# EAGLE board candle3x (EAGLE 6.6.0)
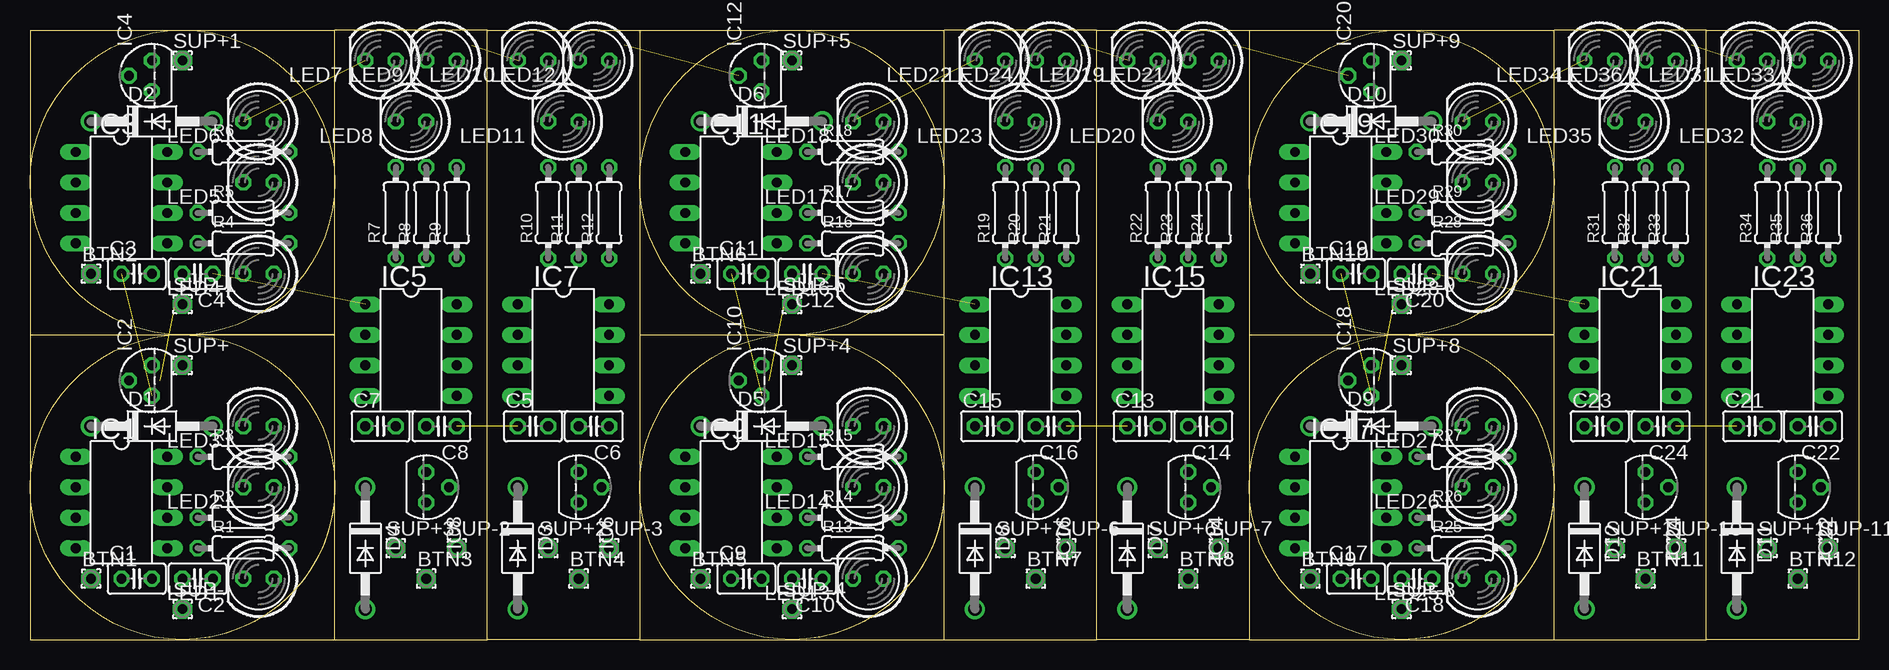
[diagram p0: board, top side]
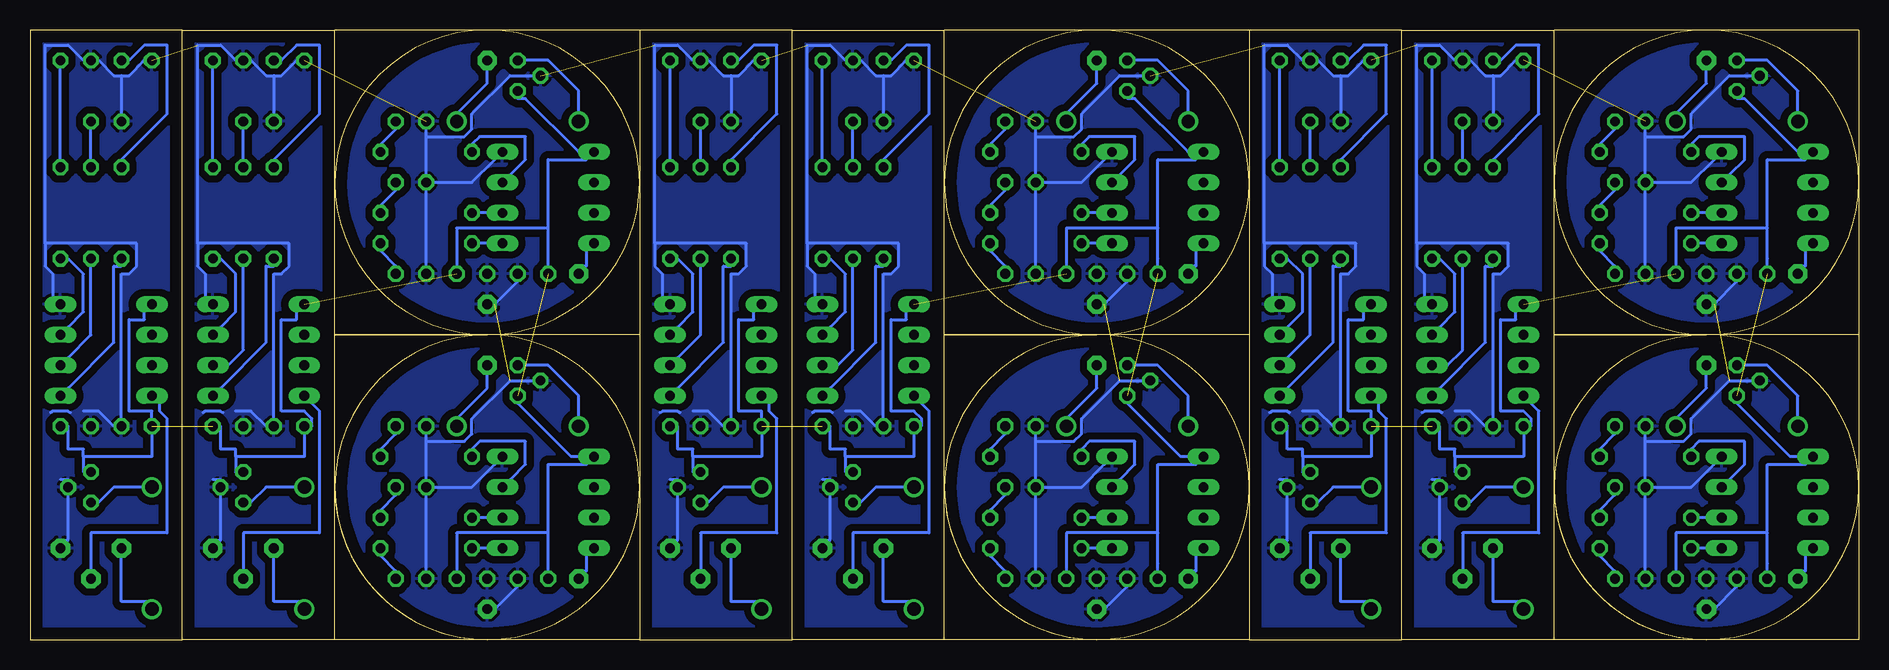
[diagram p1: board, bottom side, seen from below]

Size 152.4 x 50.8 mm. Coordinates in mm from the lower left corner, seen from the top.
Outline: 25.4,0 25.4,25.4
Outline: 25.4,25.4 12.7,25.4
Outline: 25.4,12.7 arc-90 12.7,0
Outline: 12.7,0 arc-90 0,12.7
Outline: 0,25.4 0,12.7
Outline: 0,12.7 0,0 12.7,0
Outline: 0,25.4 12.7,25.4
Outline: 12.7,25.4 25.4,25.4
Outline: 12.7,0 25.4,0
Outline: 0,12.7 arc-90 12.7,25.4
Outline: 12.7,25.4 arc-180 12.7,0
Outline: 0,38.1 0,25.4
Outline: 0,38.1 0,50.8 25.4,50.8
Outline: 25.4,25.4 25.4,38.1
Outline: 25.4,38.1 25.4,50.8
Outline: 0,38.1 arc-180 25.4,38.1
Outline: 25.4,38.1 arc-90 12.7,25.4
Outline: 12.7,25.4 arc-90 0,38.1
Outline: 25.4,0 38.1,0
Outline: 38.1,0 38.1,50.8
Outline: 38.1,50.8 25.4,50.8
Outline: 38.1,50.8 50.8,50.8
Outline: 50.8,50.8 50.8,0
Outline: 50.8,0 38.1,0
Outline: 76.2,0 76.2,25.4
Outline: 76.2,25.4 63.5,25.4
Outline: 76.2,12.7 arc-90 63.5,0
Outline: 63.5,0 arc-90 50.8,12.7
Outline: 50.8,25.4 50.8,12.7
Outline: 50.8,12.7 50.8,0
Outline: 50.8,25.4 63.5,25.4
Outline: 63.5,25.4 76.2,25.4
Outline: 50.8,0 63.5,0
Outline: 63.5,0 76.2,0
Outline: 50.8,12.7 arc-90 63.5,25.4
Outline: 63.5,25.4 arc-180 63.5,0
Outline: 50.8,38.1 50.8,25.4
Outline: 50.8,50.8 50.8,38.1
Outline: 50.8,50.8 76.2,50.8
Outline: 76.2,25.4 76.2,38.1
Outline: 76.2,38.1 76.2,50.8
Outline: 50.8,38.1 arc-180 76.2,38.1
Outline: 76.2,38.1 arc-90 63.5,25.4
Outline: 63.5,25.4 arc-90 50.8,38.1
Outline: 76.2,0 88.9,0
Outline: 88.9,0 88.9,50.8
Outline: 88.9,50.8 76.2,50.8
Outline: 88.9,50.8 101.6,50.8
Outline: 101.6,50.8 101.6,0
Outline: 101.6,0 88.9,0
Outline: 127,0 127,25.4
Outline: 127,25.4 114.3,25.4
Outline: 127,12.7 arc-90 114.3,0
Outline: 114.3,0 arc-90 101.6,12.7
Outline: 101.6,25.4 101.6,12.7
Outline: 101.6,12.7 101.6,0
Outline: 101.6,25.4 114.3,25.4
Outline: 114.3,25.4 127,25.4
Outline: 101.6,0 114.3,0
Outline: 114.3,0 127,0
Outline: 101.6,12.7 arc-90 114.3,25.4
Outline: 114.3,25.4 arc-180 114.3,0
Outline: 101.6,38.1 101.6,25.4
Outline: 101.6,50.8 101.6,38.1
Outline: 101.6,50.8 127,50.8
Outline: 127,25.4 127,38.1
Outline: 127,38.1 127,50.8
Outline: 101.6,38.1 arc-180 127,38.1
Outline: 127,38.1 arc-90 114.3,25.4
Outline: 114.3,25.4 arc-90 101.6,38.1
Outline: 127,0 139.7,0
Outline: 139.7,0 139.7,50.8
Outline: 139.7,50.8 127,50.8
Outline: 139.7,50.8 152.4,50.8 152.4,0 139.7,0
Copper layers (1*16): Top 0.035mm / dielectric 1.5mm / Bottom 0.035mm
Design rules "10mils": minimum track width 10mil, minimum drill 24mil, track to track 10mil, track to pad 10mil, pad to pad 10mil, via to via 10mil, smd to smd 10mil, copper to edge 40mil, drill to drill 10mil, minimum pad ring 10mil, minimum via ring 8mil, stop-mask expansion 0mil, vias tented up to drill 0mil, thermal gap 10mil

## Footprints (pad centres in the part's own frame; a part is rotated, then mirrored left to right if it is on the bottom)
1,6/0,8 = drill 0.813 pad 1.6 octagon: 1 0,0
C025-025X050 = drill 0.813 octagon: 1 -1.27,0; 2 1.27,0
DO41-10 = drill 1.118: A 5.08,0; C -5.08,0
DIL8 = drill 0.813 long: 1 -3.81,-3.81; 2 -1.27,-3.81; 3 1.27,-3.81; 4 3.81,-3.81; 5 3.81,3.81; 6 1.27,3.81; 7 -1.27,3.81; 8 -3.81,3.81
TO92 = drill 0.813 octagon: 1 -1.27,0; 2 0,1.905; 3 1.27,0
LED5MM = drill 0.813 octagon: A -1.27,0; K 1.27,0
0204/7 = drill 0.813 octagon: 1 -3.81,0; 2 3.81,0

## Placement (x,y rotation side)
BTN1  [1,6/0,8]  5.08,5.08 0 top
BTN2  [1,6/0,8]  5.08,30.48 0 top
BTN3  [1,6/0,8]  33.02,5.08 0 top
BTN4  [1,6/0,8]  45.72,5.08 0 top
BTN5  [1,6/0,8]  55.88,5.08 0 top
BTN6  [1,6/0,8]  55.88,30.48 0 top
BTN7  [1,6/0,8]  83.82,5.08 0 top
BTN8  [1,6/0,8]  96.52,5.08 0 top
BTN9  [1,6/0,8]  106.68,5.08 0 top
BTN10  [1,6/0,8]  106.68,30.48 0 top
BTN11  [1,6/0,8]  134.62,5.08 0 top
BTN12  [1,6/0,8]  147.32,5.08 0 top
C1  [C025-025X050]  8.89,5.08 0 top
C2  [C025-025X050]  13.97,5.08 180 top
C3  [C025-025X050]  8.89,30.48 0 top
C4  [C025-025X050]  13.97,30.48 180 top
C5  [C025-025X050]  41.91,17.78 0 top
C6  [C025-025X050]  46.99,17.78 180 top
C7  [C025-025X050]  29.21,17.78 0 top
C8  [C025-025X050]  34.29,17.78 180 top
C9  [C025-025X050]  59.69,5.08 0 top
C10  [C025-025X050]  64.77,5.08 180 top
C11  [C025-025X050]  59.69,30.48 0 top
C12  [C025-025X050]  64.77,30.48 180 top
C13  [C025-025X050]  92.71,17.78 0 top
C14  [C025-025X050]  97.79,17.78 180 top
C15  [C025-025X050]  80.01,17.78 0 top
C16  [C025-025X050]  85.09,17.78 180 top
C17  [C025-025X050]  110.49,5.08 0 top
C18  [C025-025X050]  115.57,5.08 180 top
C19  [C025-025X050]  110.49,30.48 0 top
C20  [C025-025X050]  115.57,30.48 180 top
C21  [C025-025X050]  143.51,17.78 0 top
C22  [C025-025X050]  148.59,17.78 180 top
C23  [C025-025X050]  130.81,17.78 0 top
C24  [C025-025X050]  135.89,17.78 180 top
D1  1N4004  [DO41-10]  10.16,17.78 0 top
D2  1N4004  [DO41-10]  10.16,43.18 0 top
D3  1N4004  [DO41-10]  40.64,7.62 270 top
D4  1N4004  [DO41-10]  27.94,7.62 270 top
D5  1N4004  [DO41-10]  60.96,17.78 0 top
D6  1N4004  [DO41-10]  60.96,43.18 0 top
D7  1N4004  [DO41-10]  91.44,7.62 270 top
D8  1N4004  [DO41-10]  78.74,7.62 270 top
D9  1N4004  [DO41-10]  111.76,17.78 0 top
D10  1N4004  [DO41-10]  111.76,43.18 0 top
D11  1N4004  [DO41-10]  142.24,7.62 270 top
D12  1N4004  [DO41-10]  129.54,7.62 270 top
IC1  PIC12F629P  [DIL8]  7.62,11.43 270 top
IC2  7805L  [TO92]  10.16,21.59 90 top
IC3  PIC12F629P  [DIL8]  7.62,36.83 270 top
IC4  7805L  [TO92]  10.16,46.99 90 top
IC5  PIC12F629P  [DIL8]  31.75,24.13 270 top
IC6  7805L  [TO92]  45.72,12.7 270 top
IC7  PIC12F629P  [DIL8]  44.45,24.13 270 top
IC8  7805L  [TO92]  33.02,12.7 270 top
IC9  PIC12F629P  [DIL8]  58.42,11.43 270 top
IC10  7805L  [TO92]  60.96,21.59 90 top
IC11  PIC12F629P  [DIL8]  58.42,36.83 270 top
IC12  7805L  [TO92]  60.96,46.99 90 top
IC13  PIC12F629P  [DIL8]  82.55,24.13 270 top
IC14  7805L  [TO92]  96.52,12.7 270 top
IC15  PIC12F629P  [DIL8]  95.25,24.13 270 top
IC16  7805L  [TO92]  83.82,12.7 270 top
IC17  PIC12F629P  [DIL8]  109.22,11.43 270 top
IC18  7805L  [TO92]  111.76,21.59 90 top
IC19  PIC12F629P  [DIL8]  109.22,36.83 270 top
IC20  7805L  [TO92]  111.76,46.99 90 top
IC21  PIC12F629P  [DIL8]  133.35,24.13 270 top
IC22  7805L  [TO92]  147.32,12.7 270 top
IC23  PIC12F629P  [DIL8]  146.05,24.13 270 top
IC24  7805L  [TO92]  134.62,12.7 270 top
LED1  [LED5MM]  19.05,5.08 180 top
LED2  [LED5MM]  19.05,12.7 180 top
LED3  [LED5MM]  19.05,17.78 180 top
LED4  [LED5MM]  19.05,30.48 180 top
LED5  [LED5MM]  19.05,38.1 180 top
LED6  [LED5MM]  19.05,43.18 180 top
LED7  [LED5MM]  29.21,48.26 180 top
LED8  [LED5MM]  31.75,43.18 180 top
LED9  [LED5MM]  34.29,48.26 180 top
LED10  [LED5MM]  41.91,48.26 180 top
LED11  [LED5MM]  44.45,43.18 180 top
LED12  [LED5MM]  46.99,48.26 180 top
LED13  [LED5MM]  69.85,5.08 180 top
LED14  [LED5MM]  69.85,12.7 180 top
LED15  [LED5MM]  69.85,17.78 180 top
LED16  [LED5MM]  69.85,30.48 180 top
LED17  [LED5MM]  69.85,38.1 180 top
LED18  [LED5MM]  69.85,43.18 180 top
LED19  [LED5MM]  92.71,48.26 180 top
LED20  [LED5MM]  95.25,43.18 180 top
LED21  [LED5MM]  97.79,48.26 180 top
LED22  [LED5MM]  80.01,48.26 180 top
LED23  [LED5MM]  82.55,43.18 180 top
LED24  [LED5MM]  85.09,48.26 180 top
LED25  [LED5MM]  120.65,5.08 180 top
LED26  [LED5MM]  120.65,12.7 180 top
LED27  [LED5MM]  120.65,17.78 180 top
LED28  [LED5MM]  120.65,30.48 180 top
LED29  [LED5MM]  120.65,38.1 180 top
LED30  [LED5MM]  120.65,43.18 180 top
LED31  [LED5MM]  143.51,48.26 180 top
LED32  [LED5MM]  146.05,43.18 180 top
LED33  [LED5MM]  148.59,48.26 180 top
LED34  [LED5MM]  130.81,48.26 180 top
LED35  [LED5MM]  133.35,43.18 180 top
LED36  [LED5MM]  135.89,48.26 180 top
R1  [0204/7]  17.78,7.62 0 top
R2  [0204/7]  17.78,10.16 0 top
R3  [0204/7]  17.78,15.24 0 top
R4  [0204/7]  17.78,33.02 0 top
R5  [0204/7]  17.78,35.56 0 top
R6  [0204/7]  17.78,40.64 0 top
R7  [0204/7]  30.48,35.56 90 top
R8  [0204/7]  33.02,35.56 90 top
R9  [0204/7]  35.56,35.56 90 top
R10  [0204/7]  43.18,35.56 90 top
R11  [0204/7]  45.72,35.56 90 top
R12  [0204/7]  48.26,35.56 90 top
R13  [0204/7]  68.58,7.62 0 top
R14  [0204/7]  68.58,10.16 0 top
R15  [0204/7]  68.58,15.24 0 top
R16  [0204/7]  68.58,33.02 0 top
R17  [0204/7]  68.58,35.56 0 top
R18  [0204/7]  68.58,40.64 0 top
R19  [0204/7]  81.28,35.56 90 top
R20  [0204/7]  83.82,35.56 90 top
R21  [0204/7]  86.36,35.56 90 top
R22  [0204/7]  93.98,35.56 90 top
R23  [0204/7]  96.52,35.56 90 top
R24  [0204/7]  99.06,35.56 90 top
R25  [0204/7]  119.38,7.62 0 top
R26  [0204/7]  119.38,10.16 0 top
R27  [0204/7]  119.38,15.24 0 top
R28  [0204/7]  119.38,33.02 0 top
R29  [0204/7]  119.38,35.56 0 top
R30  [0204/7]  119.38,40.64 0 top
R31  [0204/7]  132.08,35.56 90 top
R32  [0204/7]  134.62,35.56 90 top
R33  [0204/7]  137.16,35.56 90 top
R34  [0204/7]  144.78,35.56 90 top
R35  [0204/7]  147.32,35.56 90 top
R36  [0204/7]  149.86,35.56 90 top
SUP+  [1,6/0,8]  12.7,22.86 0 top
SUP+1  [1,6/0,8]  12.7,48.26 0 top
SUP+2  [1,6/0,8]  43.18,7.62 0 top
SUP+3  [1,6/0,8]  30.48,7.62 0 top
SUP+4  [1,6/0,8]  63.5,22.86 0 top
SUP+5  [1,6/0,8]  63.5,48.26 0 top
SUP+6  [1,6/0,8]  93.98,7.62 0 top
SUP+7  [1,6/0,8]  81.28,7.62 0 top
SUP+8  [1,6/0,8]  114.3,22.86 0 top
SUP+9  [1,6/0,8]  114.3,48.26 0 top
SUP+10  [1,6/0,8]  144.78,7.62 0 top
SUP+11  [1,6/0,8]  132.08,7.62 0 top
SUP-  [1,6/0,8]  12.7,2.54 0 top
SUP-1  [1,6/0,8]  12.7,27.94 0 top
SUP-2  [1,6/0,8]  35.56,7.62 0 top
SUP-3  [1,6/0,8]  48.26,7.62 0 top
SUP-4  [1,6/0,8]  63.5,2.54 0 top
SUP-5  [1,6/0,8]  63.5,27.94 0 top
SUP-6  [1,6/0,8]  86.36,7.62 0 top
SUP-7  [1,6/0,8]  99.06,7.62 0 top
SUP-8  [1,6/0,8]  114.3,2.54 0 top
SUP-9  [1,6/0,8]  114.3,27.94 0 top
SUP-10  [1,6/0,8]  137.16,7.62 0 top
SUP-11  [1,6/0,8]  149.86,7.62 0 top

## Library data of the parts
BTN1-BTN12 SUP+ SUP+1-SUP+11 SUP- SUP-1-SUP-11 = wirepad
C1-C24 R1-R36 = rcl
D1-D12 = diode
IC1 IC3 IC5 IC7 IC9 IC11 IC13 IC15 IC17 IC19 IC21 IC23 = microchip
IC2 IC4 IC6 IC8 IC10 IC12 IC14 IC16 IC18 IC20 IC22 IC24 = linear
LED1-LED36 = led

## Nets
GND: C1.2 C2.2 C3.2 C4.2 C5.2 C6.2 C7.2 C8.2 C9.2 C10.2 C11.2 C12.2 C13.2 C14.2 C15.2 C16.2 C17.2 C18.2 C19.2 C20.2 C21.2 C22.2 C23.2 C24.2 IC1.8 IC2.2 IC3.8 IC4.2 IC5.8 IC6.2 IC7.8 IC8.2 IC9.8 IC10.2 IC11.8 IC12.2 IC13.8 IC14.2 IC15.8 IC16.2 IC17.8 IC18.2 IC19.8 IC20.2 IC21.8 IC22.2 IC23.8 IC24.2 LED1.K LED2.K LED3.K LED4.K LED5.K LED6.K LED7.K LED8.K LED9.K LED10.K LED11.K LED12.K LED13.K LED14.K LED15.K LED16.K LED17.K LED18.K LED19.K LED20.K LED21.K LED22.K LED23.K LED24.K LED25.K LED26.K LED27.K LED28.K LED29.K LED30.K LED31.K LED32.K LED33.K LED34.K LED35.K LED36.K SUP-1.1 SUP-2.1 SUP-3.1 SUP-4.1 SUP-5.1 SUP-6.1 SUP-7.1 SUP-8.1 SUP-9.1 SUP-10.1 SUP-11.1 SUP-.1
N$1: IC3.7 R6.1
N$2: BTN1.1 IC1.4
N$3: IC1.7 R3.1
N$4: IC1.6 R2.1
N$5: IC1.5 R1.1
N$6: LED1.A R1.2
N$7: LED2.A R2.2
N$8: LED3.A R3.2
N$9: IC3.6 R5.1
N$10: D1.C IC2.3
N$11: IC3.5 R4.1
N$12: LED4.A R4.2
N$13: LED5.A R5.2
N$14: LED6.A R6.2
N$15: D2.C IC4.3
N$16: BTN2.1 IC3.4
N$17: IC5.7 R9.1
N$18: IC5.6 R8.1
N$19: IC5.5 R7.1
N$21: LED7.A R7.2
N$22: LED8.A R8.2
N$23: D3.C IC6.3
N$24: BTN3.1 IC5.4
N$25: IC7.7 R12.1
N$26: IC7.6 R11.1
N$27: IC7.5 R10.1
N$28: LED9.A R9.2
N$29: LED10.A R10.2
N$30: LED11.A R11.2
N$31: D4.C IC8.3
N$32: BTN4.1 IC7.4
N$33: D1.A SUP+.1
N$34: LED12.A R12.2
N$35: D3.A SUP+2.1
N$36: D4.A SUP+3.1
N$37: D2.A SUP+1.1
N$38: IC9.7 R15.1
N$39: IC9.6 R14.1
N$40: IC9.5 R13.1
N$41: D5.C IC10.3
N$42: BTN5.1 IC9.4
N$43: IC11.7 R18.1
N$44: IC11.6 R17.1
N$45: IC11.5 R16.1
N$46: D6.C IC12.3
N$47: BTN6.1 IC11.4
N$48: IC13.7 R21.1
N$49: IC13.6 R20.1
N$50: IC13.5 R19.1
N$51: D7.C IC14.3
N$52: BTN7.1 IC13.4
N$53: IC15.7 R24.1
N$54: IC15.6 R23.1
N$55: IC15.5 R22.1
N$56: D8.C IC16.3
N$57: BTN8.1 IC15.4
N$58: D5.A SUP+4.1
N$59: LED13.A R13.2
N$60: LED14.A R14.2
N$61: LED15.A R15.2
N$62: LED16.A R16.2
N$63: LED17.A R17.2
N$64: LED18.A R18.2
N$65: LED19.A R22.2
N$66: LED20.A R23.2
N$67: LED21.A R24.2
N$68: LED22.A R19.2
N$69: LED23.A R20.2
N$70: LED24.A R21.2
N$71: D7.A SUP+6.1
N$72: D8.A SUP+7.1
N$73: D6.A SUP+5.1
N$74: IC17.7 R27.1
N$75: IC17.6 R26.1
N$76: IC17.5 R25.1
N$77: D9.C IC18.3
N$78: BTN9.1 IC17.4
N$79: IC19.7 R30.1
N$80: IC19.6 R29.1
N$81: IC19.5 R28.1
N$82: D10.C IC20.3
N$83: BTN10.1 IC19.4
N$84: IC21.7 R33.1
N$85: IC21.6 R32.1
N$86: IC21.5 R31.1
N$87: D11.C IC22.3
N$88: BTN11.1 IC21.4
N$89: IC23.7 R36.1
N$90: IC23.6 R35.1
N$91: IC23.5 R34.1
N$92: D12.C IC24.3
N$93: BTN12.1 IC23.4
N$94: D9.A SUP+8.1
N$95: LED25.A R25.2
N$96: LED26.A R26.2
N$97: LED27.A R27.2
N$98: LED28.A R28.2
N$99: LED29.A R29.2
N$100: LED30.A R30.2
N$101: LED31.A R34.2
N$102: LED32.A R35.2
N$103: LED33.A R36.2
N$104: LED34.A R31.2
N$105: LED35.A R32.2
N$106: LED36.A R33.2
N$107: D11.A SUP+10.1
N$108: D12.A SUP+11.1
N$109: D10.A SUP+9.1
VCC: C1.1 C2.1 C3.1 C4.1 C5.1 C6.1 C7.1 C8.1 IC1.1 IC2.1 IC3.1 IC4.1 IC5.1 IC6.1 IC7.1 IC8.1
VCC1: C9.1 C10.1 C11.1 C12.1 C13.1 C14.1 C15.1 C16.1 IC9.1 IC10.1 IC11.1 IC12.1 IC13.1 IC14.1 IC15.1 IC16.1
VCC2: C17.1 C18.1 C19.1 C20.1 C21.1 C22.1 C23.1 C24.1 IC17.1 IC18.1 IC19.1 IC20.1 IC21.1 IC22.1 IC23.1 IC24.1

## Tracks (layer width: path | path; a pad name or v marks a point on that pad's centre or on a via)
GND  (11 unrouted)
  Bottom 0.254: 33.66,19.05 32.38,19.05 31.11,17.78 C7.2 30.48,18.41 30.48,30.48 29.84,30.48 29.21,31.11 29.21,33.02 36.83,33.02 | SUP-2.1 35.56,8.26 34.92,8.26 34.92,12.06 IC8.2 34.92,13.34 35.56,13.34 | 30.48,46.99 30.48,43.81 LED8.K | 30.48,46.99 29.84,46.99 28.57,48.26 LED7.K | 36.83,33.02 36.83,49.53 34.92,49.53 33.66,48.26 LED9.K 32.38,48.26 31.11,46.99 30.48,46.99 | 36.83,33.02 36.83,31.11 36.2,30.48 36.2,28.57 IC5.8 | 46.35,19.05 45.09,19.05 43.81,17.78 C5.2 43.18,18.41 43.18,30.48 42.55,30.48 41.91,31.11 41.91,33.02 49.53,33.02 | SUP-3.1 48.26,8.26 47.62,8.26 47.62,12.06 IC6.2 47.62,13.34 48.26,13.34 | 43.18,46.99 43.18,43.81 LED11.K | 43.18,46.99 42.55,46.99 41.27,48.26 LED10.K | 49.53,33.02 49.53,49.53 47.62,49.53 46.35,48.26 LED12.K 45.09,48.26 43.81,46.99 43.18,46.99 | 49.53,33.02 49.53,31.11 48.9,30.48 48.9,28.57 IC7.8 | C3.2 10.16,29.84 12.06,27.94 SUP-1.1 13.34,27.94 | IC3.8 12.06,40.01 13.97,38.1 17.14,38.1 LED5.K | 17.78,41.91 17.78,38.73 LED5.K | 17.78,41.91 17.78,42.55 LED6.K | 17.78,41.91 14.61,41.91 13.97,42.55 13.97,43.81 10.79,46.99 8.89,46.99 IC4.2 | LED4.K 17.78,31.11 17.78,37.47 LED5.K | C1.2 10.16,4.45 12.06,2.54 SUP-.1 13.34,2.54 | IC1.8 12.06,14.61 13.97,12.7 17.14,12.7 LED2.K | 17.78,16.51 17.78,13.34 LED2.K | 17.78,16.51 17.78,17.14 LED3.K | 17.78,16.51 14.61,16.51 13.97,17.14 13.97,18.41 10.79,21.59 8.89,21.59 IC2.2 | LED1.K 17.78,5.71 17.78,12.06 LED2.K | 49.09,18.92 48.9,19.05 47.62,19.05 47.43,18.92 | 36.39,18.92 36.2,19.05 34.92,19.05 34.73,18.92 | 84.45,19.05 83.19,19.05 81.92,17.78 C15.2 81.28,18.41 81.28,30.48 80.64,30.48 80.01,31.11 80.01,33.02 87.63,33.02
  Bottom 0.254: SUP-6.1 86.36,8.26 85.72,8.26 85.72,12.06 IC16.2 85.72,13.34 86.36,13.34 | 81.28,46.99 81.28,43.81 LED23.K | 81.28,46.99 80.64,46.99 79.38,48.26 LED22.K | 87.63,33.02 87.63,49.53 85.72,49.53 84.45,48.26 LED24.K 83.19,48.26 81.92,46.99 81.28,46.99 | 87.63,33.02 87.63,31.11 87,30.48 87,28.57 IC13.8 | 97.16,19.05 95.89,19.05 94.61,17.78 C13.2 93.98,18.41 93.98,30.48 93.34,30.48 92.71,31.11 92.71,33.02 100.33,33.02 | SUP-7.1 99.06,8.26 98.42,8.26 98.42,12.06 IC14.2 98.42,13.34 99.06,13.34 | 93.98,46.99 93.98,43.81 LED20.K | 93.98,46.99 93.34,46.99 92.08,48.26 LED19.K | 100.33,33.02 100.33,49.53 98.42,49.53 97.16,48.26 LED21.K 95.89,48.26 94.61,46.99 93.98,46.99 | 100.33,33.02 100.33,31.11 99.69,30.48 99.69,28.57 IC15.8 | C11.2 60.96,29.84 62.87,27.94 SUP-5.1 64.14,27.94 | IC11.8 62.87,40.01 64.77,38.1 67.94,38.1 LED17.K | 68.58,41.91 68.58,38.73 LED17.K | 68.58,41.91 68.58,42.55 LED18.K | 68.58,41.91 65.41,41.91 64.77,42.55 64.77,43.81 61.59,46.99 59.69,46.99 IC12.2 | LED16.K 68.58,31.11 68.58,37.47 LED17.K | C9.2 60.96,4.45 62.87,2.54 SUP-4.1 64.14,2.54 | IC9.8 62.87,14.61 64.77,12.7 67.94,12.7 LED14.K | 68.58,16.51 68.58,13.34 LED14.K | 68.58,16.51 68.58,17.14 LED15.K | 68.58,16.51 65.41,16.51 64.77,17.14 64.77,18.41 61.59,21.59 59.69,21.59 IC10.2 | LED13.K 68.58,5.71 68.58,12.06 LED14.K | 99.89,18.92 99.69,19.05 98.42,19.05 98.23,18.92 | 87.19,18.92 87,19.05 85.72,19.05 85.53,18.92 | 135.25,19.05 133.99,19.05 132.72,17.78 C23.2 132.08,18.41 132.08,30.48 131.44,30.48 130.81,31.11 130.81,33.02 138.43,33.02 | SUP-10.1 137.16,8.26 136.53,8.26 136.53,12.06 IC24.2 136.53,13.34 137.16,13.34
  Bottom 0.254: 132.08,46.99 132.08,43.81 LED35.K | 132.08,46.99 131.44,46.99 130.18,48.26 LED34.K | 138.43,33.02 138.43,49.53 136.53,49.53 135.25,48.26 LED36.K 133.99,48.26 132.72,46.99 132.08,46.99 | 138.43,33.02 138.43,31.11 137.79,30.48 137.79,28.57 IC21.8 | 147.96,19.05 146.69,19.05 145.41,17.78 C21.2 144.78,18.41 144.78,30.48 144.15,30.48 143.51,31.11 143.51,33.02 151.13,33.02 | SUP-11.1 149.86,8.26 149.22,8.26 149.22,12.06 IC22.2 149.22,13.34 149.86,13.34 | 144.78,46.99 144.78,43.81 LED32.K | 144.78,46.99 144.15,46.99 142.88,48.26 LED31.K | 151.13,33.02 151.13,49.53 149.22,49.53 147.96,48.26 LED33.K 146.69,48.26 145.41,46.99 144.78,46.99 | 151.13,33.02 151.13,31.11 150.5,30.48 150.5,28.57 IC23.8 | C19.2 111.76,29.84 113.67,27.94 SUP-9.1 114.94,27.94 | IC19.8 113.67,40.01 115.57,38.1 118.75,38.1 LED29.K | 119.38,41.91 119.38,38.73 LED29.K | 119.38,41.91 119.38,42.55 LED30.K | 119.38,41.91 116.2,41.91 115.57,42.55 115.57,43.81 112.39,46.99 110.49,46.99 IC20.2 | LED28.K 119.38,31.11 119.38,37.47 LED29.K | C17.2 111.76,4.45 113.67,2.54 SUP-8.1 114.94,2.54 | IC17.8 113.67,14.61 115.57,12.7 118.75,12.7 LED26.K | 119.38,16.51 119.38,13.34 LED26.K | 119.38,16.51 119.38,17.14 LED27.K | 119.38,16.51 116.2,16.51 115.57,17.14 115.57,18.41 112.39,21.59 110.49,21.59 IC18.2 | LED25.K 119.38,5.71 119.38,12.06 LED26.K | 150.69,18.92 150.5,19.05 149.22,19.05 149.03,18.92 | 137.99,18.92 137.79,19.05 136.53,19.05 136.33,18.92
  pour Bottom (isolate 0.61): 0,50.8 50.8,50.8 50.8,0 0,0
  pour Bottom (isolate 0.61): 50.8,50.8 101.6,50.8 101.6,0 50.8,0
  pour Bottom (isolate 0.61): 101.6,50.8 152.4,50.8 152.4,0 101.6,0
N$1
  Bottom 0.254: IC3.7 10.79,38.73 9.53,40.01 9.53,41.91 13.34,41.91 13.97,41.27 R6.1
N$2
  Bottom 0.254: IC1.4 4.45,6.99 4.45,5.71 5.08,5.71 BTN1.1
N$3
  Bottom 0.254: IC1.7 10.79,13.34 9.53,14.61 9.53,16.51 13.34,16.51 13.97,15.88 R3.1
N$4
  Bottom 0.254: IC1.6 12.7,10.16 13.34,10.16 R2.1
N$5
  Bottom 0.254: IC1.5 12.7,7.62 13.34,7.62 R1.1
N$6
  Bottom 0.254: LED1.A 20.32,5.71 21.59,6.99 R1.2
N$7
  Bottom 0.254: R2.2 21.59,10.79 20.32,12.06 LED2.A
N$8
  Bottom 0.254: R3.2 21.59,15.88 20.32,17.14 LED3.A
N$9
  Bottom 0.254: IC3.6 12.7,35.56 13.34,35.56 R5.1
N$10
  Bottom 0.254: D1.C 5.08,20.32 7.62,22.86 IC2.3
N$11
  Bottom 0.254: IC3.5 12.7,33.02 13.34,33.02 R4.1
N$12
  Bottom 0.254: LED4.A 20.32,31.11 21.59,32.38 R4.2
N$13
  Bottom 0.254: R5.2 21.59,36.2 20.32,37.47 LED5.A
N$14
  Bottom 0.254: R6.2 21.59,41.27 20.32,42.55 LED6.A
N$15
  Bottom 0.254: D2.C 5.08,45.72 7.62,48.26 IC4.3
N$16
  Bottom 0.254: IC3.4 4.45,32.38 4.45,31.11 5.08,31.11 BTN2.1
N$17
  Bottom 0.254: IC5.7 34.92,26.04 33.66,27.3 33.66,30.48 34.92,31.75 R9.1
N$18
  Bottom 0.254: R8.1 33.02,31.11 33.02,24.13 34.29,22.86 IC5.6
N$19
  Bottom 0.254: IC5.5 34.92,20.95 31.11,24.77 31.11,31.11 30.48,31.11 R7.1
N$21
  Bottom 0.254: R7.2 30.48,40.01 26.67,43.81 26.67,49.53 28.57,49.53 29.84,48.26 LED7.A
N$22
  Bottom 0.254: R8.2 33.02,40.01 33.02,42.55 LED8.A
N$23
  Bottom 0.254: IC6.3 45.09,11.43 43.81,12.7 41.27,12.7 D3.C
N$24
  Bottom 0.254: IC5.4 26.67,19.05 26.67,8.89 33.02,8.89 BTN3.1
N$25
  Bottom 0.254: IC7.7 47.62,26.04 46.35,27.3 46.35,30.48 47.62,31.75 R12.1
N$26
  Bottom 0.254: IC7.6 47.62,23.5 45.72,25.4 45.72,31.11 R11.1
N$27
  Bottom 0.254: IC7.5 47.62,20.95 43.81,24.77 43.81,31.11 43.18,31.11 R10.1
N$28
  Bottom 0.254: R9.2 35.56,40.01 35.56,47.62 LED9.A
N$29
  Bottom 0.254: R10.2 43.18,40.01 39.37,43.81 39.37,49.53 41.27,49.53 42.55,48.26 LED10.A
N$30
  Bottom 0.254: R11.2 45.72,40.01 45.72,42.55 LED11.A
N$31
  Bottom 0.254: IC8.3 32.38,11.43 31.11,12.7 28.57,12.7 D4.C
N$32
  Bottom 0.254: IC7.4 40.01,19.68 40.01,19.05 39.37,18.41 39.37,8.89 45.72,8.89 BTN4.1
N$33
  Bottom 0.254: SUP+.1 12.7,22.23 12.7,20.95 15.24,18.41 D1.A
N$34
  Bottom 0.254: R12.2 48.26,40.01 48.26,47.62 LED12.A
N$35
  Bottom 0.254: SUP+2.1 43.18,6.99 43.18,3.17 40.64,3.17 D3.A
N$36
  Bottom 0.254: SUP+3.1 30.48,6.99 30.48,3.17 27.94,3.17 D4.A
N$37
  Bottom 0.254: SUP+1.1 12.7,47.62 12.7,46.35 15.24,43.81 D2.A
N$38
  Bottom 0.254: IC9.7 61.59,13.34 60.33,14.61 60.33,16.51 64.14,16.51 64.77,15.88 R15.1
N$39
  Bottom 0.254: IC9.6 63.5,10.16 64.14,10.16 R14.1
N$40
  Bottom 0.254: IC9.5 63.5,7.62 64.14,7.62 R13.1
N$41
  Bottom 0.254: D5.C 55.88,20.32 58.42,22.86 IC10.3
N$42
  Bottom 0.254: IC9.4 55.24,6.99 55.24,5.71 55.88,5.71 BTN5.1
N$43
  Bottom 0.254: IC11.7 61.59,38.73 60.33,40.01 60.33,41.91 64.14,41.91 64.77,41.27 R18.1
N$44
  Bottom 0.254: IC11.6 63.5,35.56 64.14,35.56 R17.1
N$45
  Bottom 0.254: IC11.5 63.5,33.02 64.14,33.02 R16.1
N$46
  Bottom 0.254: D6.C 55.88,45.72 58.42,48.26 IC12.3
N$47
  Bottom 0.254: IC11.4 55.24,32.38 55.24,31.11 55.88,31.11 BTN6.1
N$48
  Bottom 0.254: IC13.7 85.72,26.04 84.45,27.3 84.45,30.48 85.72,31.75 R21.1
N$49
  Bottom 0.254: R20.1 83.82,31.11 83.82,24.13 85.09,22.86 IC13.6
N$50
  Bottom 0.254: IC13.5 85.72,20.95 81.92,24.77 81.92,31.11 81.28,31.11 R19.1
N$51
  Bottom 0.254: IC14.3 95.89,11.43 94.61,12.7 92.08,12.7 D7.C
N$52
  Bottom 0.254: IC13.4 77.47,19.05 77.47,8.89 83.82,8.89 BTN7.1
N$53
  Bottom 0.254: IC15.7 98.42,26.04 97.16,27.3 97.16,30.48 98.42,31.75 R24.1
N$54
  Bottom 0.254: IC15.6 98.42,23.5 96.52,25.4 96.52,31.11 R23.1
N$55
  Bottom 0.254: IC15.5 98.42,20.95 94.61,24.77 94.61,31.11 93.98,31.11 R22.1
N$56
  Bottom 0.254: IC16.3 83.19,11.43 81.92,12.7 79.38,12.7 D8.C
N$57
  Bottom 0.254: IC15.4 90.81,19.68 90.81,19.05 90.17,18.41 90.17,8.89 96.52,8.89 BTN8.1
N$58
  Bottom 0.254: SUP+4.1 63.5,22.23 63.5,20.95 66.04,18.41 D5.A
N$59
  Bottom 0.254: LED13.A 71.12,5.71 72.39,6.99 R13.2
N$60
  Bottom 0.254: R14.2 72.39,10.79 71.12,12.06 LED14.A
N$61
  Bottom 0.254: R15.2 72.39,15.88 71.12,17.14 LED15.A
N$62
  Bottom 0.254: LED16.A 71.12,31.11 72.39,32.38 R16.2
N$63
  Bottom 0.254: R17.2 72.39,36.2 71.12,37.47 LED17.A
N$64
  Bottom 0.254: R18.2 72.39,41.27 71.12,42.55 LED18.A
N$65
  Bottom 0.254: R22.2 93.98,40.01 90.17,43.81 90.17,49.53 92.08,49.53 93.34,48.26 LED19.A
N$66
  Bottom 0.254: R23.2 96.52,40.01 96.52,42.55 LED20.A
N$67
  Bottom 0.254: R24.2 99.06,40.01 99.06,47.62 LED21.A
N$68
  Bottom 0.254: R19.2 81.28,40.01 77.47,43.81 77.47,49.53 79.38,49.53 80.64,48.26 LED22.A
N$69
  Bottom 0.254: R20.2 83.82,40.01 83.82,42.55 LED23.A
N$70
  Bottom 0.254: R21.2 86.36,40.01 86.36,47.62 LED24.A
N$71
  Bottom 0.254: SUP+6.1 93.98,6.99 93.98,3.17 91.44,3.17 D7.A
N$72
  Bottom 0.254: SUP+7.1 81.28,6.99 81.28,3.17 78.74,3.17 D8.A
N$73
  Bottom 0.254: SUP+5.1 63.5,47.62 63.5,46.35 66.04,43.81 D6.A
N$74
  Bottom 0.254: IC17.7 112.39,13.34 111.12,14.61 111.12,16.51 114.94,16.51 115.57,15.88 R27.1
N$75
  Bottom 0.254: IC17.6 114.3,10.16 114.94,10.16 R26.1
N$76
  Bottom 0.254: IC17.5 114.3,7.62 114.94,7.62 R25.1
N$77
  Bottom 0.254: D9.C 106.68,20.32 109.22,22.86 IC18.3
N$78
  Bottom 0.254: IC17.4 106.05,6.99 106.05,5.71 106.68,5.71 BTN9.1
N$79
  Bottom 0.254: IC19.7 112.39,38.73 111.12,40.01 111.12,41.91 114.94,41.91 115.57,41.27 R30.1
N$80
  Bottom 0.254: IC19.6 114.3,35.56 114.94,35.56 R29.1
N$81
  Bottom 0.254: IC19.5 114.3,33.02 114.94,33.02 R28.1
N$82
  Bottom 0.254: D10.C 106.68,45.72 109.22,48.26 IC20.3
N$83
  Bottom 0.254: IC19.4 106.05,32.38 106.05,31.11 106.68,31.11 BTN10.1
N$84
  Bottom 0.254: IC21.7 136.53,26.04 135.25,27.3 135.25,30.48 136.53,31.75 R33.1
N$85
  Bottom 0.254: R32.1 134.62,31.11 134.62,24.13 135.89,22.86 IC21.6
N$86
  Bottom 0.254: IC21.5 136.53,20.95 132.72,24.77 132.72,31.11 132.08,31.11 R31.1
N$87
  Bottom 0.254: IC22.3 146.69,11.43 145.41,12.7 142.88,12.7 D11.C
N$88
  Bottom 0.254: IC21.4 128.27,19.05 128.27,8.89 134.62,8.89 BTN11.1
N$89
  Bottom 0.254: IC23.7 149.22,26.04 147.96,27.3 147.96,30.48 149.22,31.75 R36.1
N$90
  Bottom 0.254: IC23.6 149.22,23.5 147.32,25.4 147.32,31.11 R35.1
N$91
  Bottom 0.254: IC23.5 149.22,20.95 145.41,24.77 145.41,31.11 144.78,31.11 R34.1
N$92
  Bottom 0.254: IC24.3 133.99,11.43 132.72,12.7 130.18,12.7 D12.C
N$93
  Bottom 0.254: IC23.4 141.6,19.68 141.6,19.05 140.97,18.41 140.97,8.89 147.32,8.89 BTN12.1
N$94
  Bottom 0.254: SUP+8.1 114.3,22.23 114.3,20.95 116.84,18.41 D9.A
N$95
  Bottom 0.254: LED25.A 121.92,5.71 123.19,6.99 R25.2
N$96
  Bottom 0.254: R26.2 123.19,10.79 121.92,12.06 LED26.A
N$97
  Bottom 0.254: R27.2 123.19,15.88 121.92,17.14 LED27.A
N$98
  Bottom 0.254: LED28.A 121.92,31.11 123.19,32.38 R28.2
N$99
  Bottom 0.254: R29.2 123.19,36.2 121.92,37.47 LED29.A
N$100
  Bottom 0.254: R30.2 123.19,41.27 121.92,42.55 LED30.A
N$101
  Bottom 0.254: R34.2 144.78,40.01 140.97,43.81 140.97,49.53 142.88,49.53 144.15,48.26 LED31.A
N$102
  Bottom 0.254: R35.2 147.32,40.01 147.32,42.55 LED32.A
N$103
  Bottom 0.254: R36.2 149.86,40.01 149.86,47.62 LED33.A
N$104
  Bottom 0.254: R31.2 132.08,40.01 128.27,43.81 128.27,49.53 130.18,49.53 131.44,48.26 LED34.A
N$105
  Bottom 0.254: R32.2 134.62,40.01 134.62,42.55 LED35.A
N$106
  Bottom 0.254: R33.2 137.16,40.01 137.16,47.62 LED36.A
N$107
  Bottom 0.254: SUP+10.1 144.78,6.99 144.78,3.17 142.24,3.17 D11.A
N$108
  Bottom 0.254: SUP+11.1 132.08,6.99 132.08,3.17 129.54,3.17 D12.A
N$109
  Bottom 0.254: SUP+9.1 114.3,47.62 114.3,46.35 116.84,43.81 D10.A
VCC  (3 unrouted)
  Bottom 0.254: IC4.1 10.16,45.09 9.53,45.09 5.08,40.64 IC3.1 4.45,40.01 7.62,40.01 7.62,34.29 | 7.62,34.29 7.62,31.75 7.62,31.11 C3.1 | 7.62,8.89 7.62,6.35 7.62,5.71 C1.1 | 7.62,8.89 7.62,14.61 4.45,14.61 IC1.1 5.08,15.24 5.71,15.24 10.16,19.68 IC2.1 | 7.62,8.89 15.24,8.89 15.24,5.71 C2.1 | 7.62,34.29 15.24,34.29 15.24,31.11 C4.1 | 33.66,15.24 33.66,15.88 34.92,15.88 34.92,17.78 C8.1 | 33.66,15.24 33.66,13.97 IC8.1 | 33.66,15.24 27.94,15.24 27.94,17.14 C7.1 27.3,17.78 27.3,18.41 27.94,19.05 29.84,19.05 29.84,26.67 28.57,26.67 28.57,27.3 IC5.1 | 46.35,15.24 46.35,15.88 47.62,15.88 47.62,17.78 C6.1 | 46.35,15.24 46.35,13.97 IC6.1 | 46.35,15.24 40.64,15.24 40.64,17.14 C5.1 40.64,18.41 40.64,19.05 42.55,19.05 42.55,26.67 41.27,26.67 41.27,27.3 IC7.1
VCC1  (3 unrouted)
  Bottom 0.254: IC12.1 60.96,45.09 60.33,45.09 55.88,40.64 IC11.1 55.24,40.01 58.42,40.01 58.42,34.29 | 58.42,34.29 58.42,31.75 58.42,31.11 C11.1 | 58.42,8.89 58.42,6.35 58.42,5.71 C9.1 | 58.42,8.89 58.42,14.61 55.24,14.61 IC9.1 55.88,15.24 56.52,15.24 60.96,19.68 IC10.1 | 58.42,8.89 66.04,8.89 66.04,5.71 C10.1 | 58.42,34.29 66.04,34.29 66.04,31.11 C12.1 | 84.45,15.24 84.45,15.88 85.72,15.88 85.72,17.78 C16.1 | 84.45,15.24 84.45,13.97 IC16.1 | 84.45,15.24 78.74,15.24 78.74,17.14 C15.1 78.11,17.78 78.11,18.41 78.74,19.05 80.64,19.05 80.64,26.67 79.38,26.67 79.38,27.3 IC13.1 | 97.16,15.24 97.16,15.88 98.42,15.88 98.42,17.78 C14.1 | 97.16,15.24 97.16,13.97 IC14.1 | 97.16,15.24 91.44,15.24 91.44,17.14 C13.1 91.44,18.41 91.44,19.05 93.34,19.05 93.34,26.67 92.08,26.67 92.08,27.3 IC15.1
VCC2  (3 unrouted)
  Bottom 0.254: IC20.1 111.76,45.09 111.12,45.09 106.68,40.64 IC19.1 106.05,40.01 109.22,40.01 109.22,34.29 | 109.22,34.29 109.22,31.75 109.22,31.11 C19.1 | 109.22,8.89 109.22,6.35 109.22,5.71 C17.1 | 109.22,8.89 109.22,14.61 106.05,14.61 IC17.1 106.68,15.24 107.31,15.24 111.76,19.68 IC18.1 | 109.22,8.89 116.84,8.89 116.84,5.71 C18.1 | 109.22,34.29 116.84,34.29 116.84,31.11 C20.1 | 135.25,15.24 135.25,15.88 136.53,15.88 136.53,17.78 C24.1 | 135.25,15.24 135.25,13.97 IC24.1 | 135.25,15.24 129.54,15.24 129.54,17.14 C23.1 128.91,17.78 128.91,18.41 129.54,19.05 131.44,19.05 131.44,26.67 130.18,26.67 130.18,27.3 IC21.1 | 147.96,15.24 147.96,15.88 149.22,15.88 149.22,17.78 C22.1 | 147.96,15.24 147.96,13.97 IC22.1 | 147.96,15.24 142.24,15.24 142.24,17.14 C21.1 142.24,18.41 142.24,19.05 144.15,19.05 144.15,26.67 142.88,26.67 142.88,27.3 IC23.1